# Altium PCB Ajchel_Jakub_plytka_wstepne_rozmieszczenie.PcbDoc
Units mm, origin at the board's own origin, x right, y up, seen from the top; angles counter-clockwise.
Board outline 152.4 x 101.6 mm, 2 copper layers (Top Layer, Bottom Layer); 80 components, 0 nets, 216 pads, 66 vias.
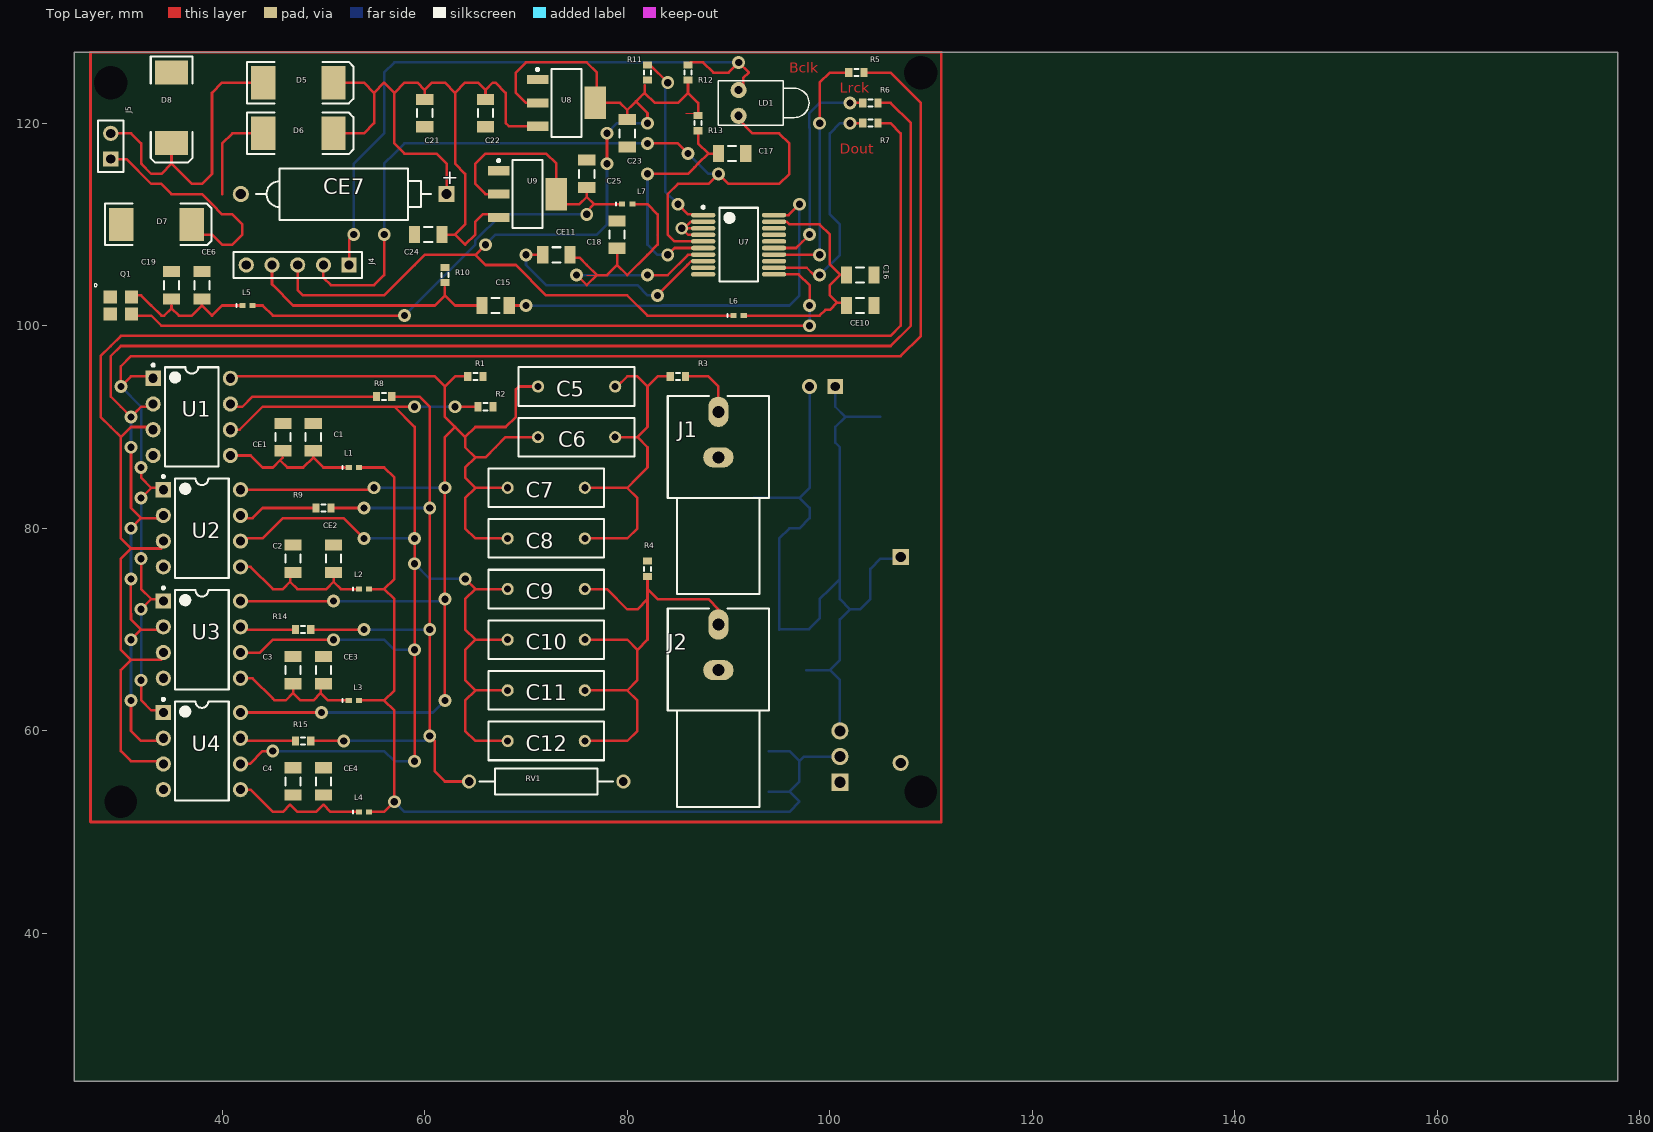
[diagram p0: Top Layer view]
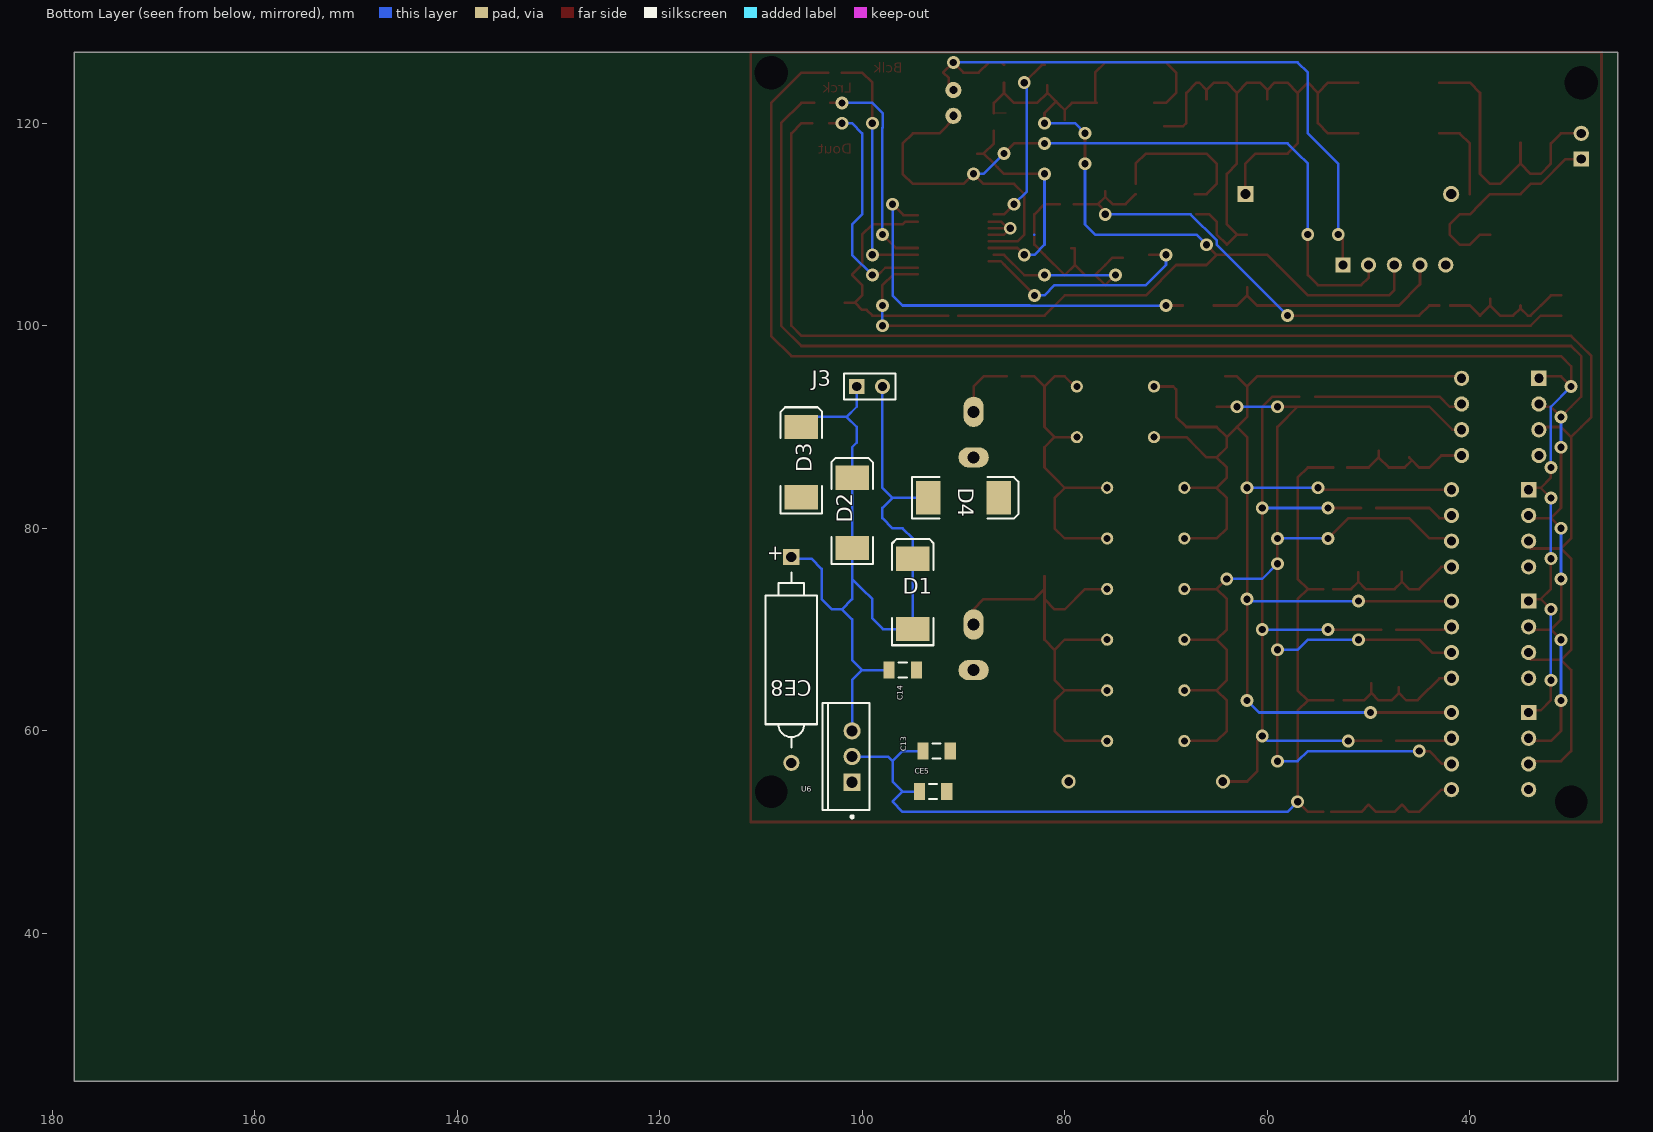
[diagram p1: Bottom Layer view, seen from below]

## Layer stack, top to bottom
Top Solder: solder mask 0.0102, Solder Resist, Dk 3.5
Top Layer: signal copper 0.0356
Dielectric 1: dielectric 0.32, FR-4, Dk 4.8
Bottom Layer: signal copper 0.0356
Bottom Solder: solder mask 0.0102, Solder Resist, Dk 3.5

## Board outline
25.4,25.4 177.8,25.4 177.8,127 25.4,127

## Design rules (kind name [scope] priority, off if disabled: settings)
Clearance [All] p1: gap=0.254 ignorepadtopadclearanceinfootprint=FALSE except(0: Arc-Hole Track-Hole SMDPad-Hole THPad-Hole Via-Hole Fill-Hole Poly-Hole Region-Hole Text-Hole)
PolygonConnect [All] p1: connectstyle=Relief reliefconductorwidth=0.254 reliefentries=4 polygonreliefangle="90 Angle" airgapwidth=0.254
RoutingVias [All] p1: holewidth=0.711 width=1.27 viastyle="Through Hole" minholewidth=0.711 minwidth=1.27 maxholewidth=0.711 maxwidth=1.27
SolderMaskExpansion [All] p1: expansion=0.102
Width [All] p1: maxlimit=0.254 minlimit=0.254 preferedwidth=0.254
30 further rules are at their usual default settings.

## Components (designator, comment, footprint, x,y, rotation, side; value= is the part's Value field where it differs from the comment)
C1 "Comment" C1206 49,89 r90 top
C2 "Comment" C1206 47,77 r90 top
C3 "Comment" C1206 47,66 r90 top
C4 "Comment" C1206 47,55 r90 top
C5 "Comment" RAD-0.3 75,94 r0 top
C6 "Comment" RAD-0.3 75,89 r0 top
C7 "Comment" RAD-0.3 72,84 r0 top
C8 "Comment" RAD-0.3 72,79 r0 top
C9 "Comment" RAD-0.3 72,74 r0 top
C10 "Comment" RAD-0.3 72,69 r0 top
C11 "Comment" RAD-0.3 72,64 r0 top
C12 "Comment" RAD-0.3 72,59 r0 top
C13 "Comment" C1206 92.65,58 r0 bottom
C14 "Comment" C1206 96,66 r0 bottom
C15 "Comment" C1206 67,102 r0 top
C16 "Comment" C1206 103,105 r0 top
C17 "Comment" C1206 90.35,117 r0 top
C18 "Comment" C1206 79,109 r90 top
C19 "Comment" C1206 35,104 r90 top
C21 "Comment" C1206 60,121 r90 top
C22 "Comment" C1206 66,121 r90 top
C23 "Comment" C1206 80,119 r90 top
C24 "Comment" C1206 60.35,109 r0 top
C25 "Comment" C1206 76,115 r90 top
CE1 "Comment" C1206 46,89 r90 top
CE2 "Comment" C1206 51,77 r90 top
CE3 "Comment" C1206 50,66 r90 top
CE4 "Comment" C1206 50,55 r90 top
CE5 "Comment" C1206 93,54 r0 bottom
CE6 "Comment" C1206 38,104 r90 top
CE7 "Comment" POLAR0.8 52,113 r0 top
CE8 "Comment" POLAR0.8 107,67 r90 bottom
CE10 "Comment" C1206 103,102 r0 top
CE11 "Comment" C1206 73,107 r0 top
D1 "Comment" SMC 95,73.525 r90 bottom
D2 "Comment" SMC 101,81.525 r90 bottom
D3 "Comment" SMC 106,86.525 r90 bottom
D4 "Comment" SMC 90,83 r180 bottom
D5 "Comment" SMC 47.525,124 r0 top
D6 "Comment" SMC 47.525,119 r0 top
D7 "Comment" SMC 33.525,110 r0 top
D8 "Comment" SMC 35,121.525 r270 top (schematic designator D5)
J1 "Comment" RCA/4.5-H2 89,83 r270 top
J2 "Comment" RCA/4.5-H2 89,62 r270 top
J3 "Comment" HDR1X2 100.54,94 r180 bottom
J4 "Comment" HDR1X5 52.54,106 r180 top
J5 "Comment" HDR1X2 29,116.46 r90 top
L1 "Comment" 0402-A 53,86 r0 top
L2 "Comment" 0402-A 54,74 r0 top
L3 "Comment" 0402-A 53,63 r0 top
L4 "Comment" 0402-A 54,52 r0 top
L5 "Comment" 0402-A 42.5,102 r0 top
L6 "Comment" 0402-A 91,101 r0 top
L7 "Comment" 0402-A 80,112 r0 top
LD1 "Comment" LED-1 91,122 r0 top
Q1 "Comment" "CTS 403" 30,102 r0 top
R1 "Comment" J1-0603 65,95 r0 top
R2 "Comment" J1-0603 66,92 r0 top
R3 "Comment" J1-0603 85,95 r0 top
R4 "Comment" J1-0603 82,76 r90 top
R5 "Comment" J1-0603 102.625,125 r0 top
R6 "Comment" J1-0603 104,122 r0 top
R7 "Comment" J1-0603 104,120 r0 top
R8 "Comment" J1-0603 56,93 r0 top
R9 "Comment" J1-0603 50,82 r0 top
R10 "Comment" J1-0603 62,105 r90 top
R11 "Comment" J1-0603 82,125 r90 top
R12 "Comment" J1-0603 86,125 r90 top
R13 "Comment" J1-0603 87,120 r90 top
R14 "Comment" J1-0603 48,70 r0 top
R15 "Comment" J1-0603 48,59 r0 top
RV1 "Comment" AXIAL-0.6 72,55 r0 top
U1 "Comment" DIP8 37,91 r0 top
U2 "Comment" DIP8 38,80 r0 top
U3 "Comment" DIP8 38,69 r0 top
U4 "Comment" DIP8 38,58 r0 top
U6 "Comment" LT-T-3 101,57.46 r0 bottom
U7 "Comment" SSOP20_M 91,108 r0 top
U8 "Comment" MP04A_L 74,122 r0 top
U9 "Comment" MP04A_L 70.15,113 r0 top

## Footprints (in the part's own frame and the unit in brackets; to place one, negate y for a bottom-side part, rotate by r counter-clockwise, add the part's x,y. Pads: shape width x height; smd on the part's side, far side on the other; paste and mask are expansions set on the pad)
0402-A [mm] "Chip Inductor, Body 1.0x0.5mm, IPC High Density"
  rect 0.6x0.5 smd: 1(-0.5,0) 2(0.5,0)
  silkscreen extent -1.1,-0.15 -1.1,0.15, body extent -0.55,-0.3 0.55,0.3, height 0.55
AXIAL-0.6 [mm] "Axial Device, Thru-Hole; 2 Leads; 0.6 in Pin Spacing"
  round 1.4 hole 0.85: 1(-7.62,0) 2(7.62,0)
  silkscreen extent -6.6,-1.27 6.6,1.27
C1206 [mm] "Chip Capacitor, Body 3.2x1.6mm, IPC High Density"
  rect 1.1x1.7 smd: 1(-1.35,0) 2(1.35,0)
  silkscreen extent -0.4,-0.75 0.4,0.75, body extent -1.7,-0.9 1.7,0.9, height 1.3
"CTS 403" [mm]
  rect 1.3x1.3 smd: 1(-1.05,0.85) 2(-1.05,-0.85) 3(1.05,-0.85) 4(1.05,0.85)
  silkscreen extent -2.64,1.86 -2.36,2.14, body extent -1.6,-1.25 1.6,1.25, height 0.77
DIP8 [mm] "DIP, 8-Leads, Row Spacing 7.62mm, Pitch 2.54mm, Body 9.33x6.35mm"
  rect 1.5x1.5 hole 0.9: 1(-3.81,3.81)
  round 1.5 hole 0.9: 2(-3.81,1.27) 3(-3.81,-1.27) 4(-3.81,-3.81) 5(3.81,-3.81) 6(3.81,-1.27) 7(3.81,1.27) 8(3.81,3.81)
  silkscreen extent -3.93,-4.9 2.65,5.23, body extent -3.3,-4.9 3.3,4.9, height 5.08
HDR1X2 [mm] "Connector; Header; 2 Position"
  rect 1.5x1.5 hole 0.9: 1(0,0)
  round 1.5 hole 0.9: 2(2.54,0)
  silkscreen extent -1.27,-1.27 3.81,1.27
HDR1X5 [mm] "Connector; Header; 5 Position"
  rect 1.5x1.5 hole 0.9: 1(0,0)
  round 1.5 hole 0.9: 2(2.54,0) 3(5.08,0) 4(7.62,0) 5(10.16,0)
  silkscreen extent -1.27,-1.27 11.43,1.27
J1-0603 [mm] "Chip Resistor, Body 1.6x0.8mm, IPC High Density"
  rect 0.7x0.9 smd: 1(-0.75,0) 2(0.75,0)
  silkscreen extent -0.2,-0.35 0.2,0.35, body extent -0.85,-0.48 0.85,0.48, height 0.9
LED-1 [mm] "LED; 2 Leads"
  round 1.6 hole 0.8: 1(0,1.27) 2(0,-1.27)
  silkscreen extent -2,-2.2 6.95,2.2
LT-T-3 [mm] "T, 3-Leads, Body 10.55x4.6mm, Pitch 2.54mm"
  rect 1.7x1.7 hole 1.1: 1(0,2.54)
  round 1.7 hole 1.1: 2(0,0) 3(0,-2.54)
  silkscreen extent -1.7,-5.3 2.9,6.07, body extent -1.7,-5.28 2.9,5.28, height 22.15
MP04A_L [mm] "SOT223, 4-Leads, Body 6.5x3.5mm, Pitch 2.3mm, Lead Span 7mm, IPC High Density"
  rect 2.1x0.9 smd: 1(-2.85,2.3) 2(-2.85,0) 3(-2.85,-2.3)
  rect 2.1x3.2 smd: 4(2.85,0)
  silkscreen extent -2.97,-3.35 1.5,3.42, body extent -1.86,-3.35 1.86,3.35, height 1.8
POLAR0.8 [mm] "Polarized Capacitor; 2 Leads"
  rect 1.6x1.6 hole 1: 1(10.16,0)
  round 1.6 hole 1: 2(-10.16,0)
  silkscreen extent -8.64,-2.54 8.64,2.54
RAD-0.3 [mm] "Radial Cap, Thru-Hole; 2 Leads; 0.3 in Pin Spacing"
  round 1.2 hole 0.7: 1(-3.81,0) 2(3.81,0)
  silkscreen extent -5.71,-1.91 5.71,1.91
RCA/4.5-H2 [mm] "Two Conductor Jack (RCA), Right Angle, Thru-Hole, Body 10 x 10 x 13 mm (WxTxH)"
  oval 2x3 hole 1.2: 1A(-4,0)
  oval 3x2 hole 1.2: 2B(-8.496,0)
  silkscreen extent -10.07,-5 9.5,5
SMC [mm] "DO-214-AB/SMC; 2 C-Bend Leads; Body 7.9 x 5.9 mm, inc. leads (LxW)"
  rect 2.4x3.3 smd: 1(-3.475,0) 2(3.475,0)
  silkscreen extent -5.07,-2.05 5.43,2.05
SSOP20_M [mm] "SOP, 20-Leads, Body 7.2x5.29mm, Pitch 0.65mm, IPC Low Density"
  oval 2.4x0.45 smd: 1(-3.5,2.925) 2(-3.5,2.275) 3(-3.5,1.625) 4(-3.5,0.975) 5(-3.5,0.325) 6(-3.5,-0.325) 7(-3.5,-0.975) 8(-3.5,-1.625) 9(-3.5,-2.275) 10(-3.5,-2.925) 11(3.5,-2.925) 12(3.5,-2.275) 13(3.5,-1.625) 14(3.5,-0.975) 15(3.5,-0.325) 16(3.5,0.325) 17(3.5,0.975) 18(3.5,1.625) 19(3.5,2.275) 20(3.5,2.925)
  silkscreen extent -3.62,-3.65 1.9,3.82, body extent -2.69,-3.66 2.69,3.67, height 1.98

## Part data
C1 C2 C3 C4 C5 C6 C7 C8 C9 C10 C11 C12 C13 C14 C15 C16 C17 C18 C19 C21 C22 C23 C24 C25: library part Cap, "Capacitor"
CE7 CE8: library part "Cap Pol2", "Polarized Capacitor (Axial)"
D1 D2 D3 D4 D5 D6 D7 D8: library part D-AK-2
J1 J2: library part RCA, "RCA Phono Jack, Right Angle, Thru-Hole, Snap-In"
J3 J5: library part "Header 2", "Header, 2-Pin"
J4: library part "Header 5", "Header, 5-Pin"
L1 L2 L3 L4 L5 L6 L7: library part Inductor, "Inductor"
LD1: library part LED1, "Typical RED GaAs LED"
Q1: library part Oscilator12mhz, "Oscilator 12MHz"
R1 R2 R3 R4 R5 R6 R7 R8 R9 R10 R11 R12 R13 R14 R15: library part Res2, "Resistor"
RV1: library part "Res Adj2", "Variable Resistor"
U1 U2 U3 U4: library part TDA1543, "TDA1543"
U6: library part LT-LT1086-T-3
U7: library part WM8804
U8 U9: library part PM-REG-LM1086ADJ-SOT4

## Free pads (board coordinates)
  round 1.524 hole 3.3 unplated: 1(29,124) 4(109,125)
  round 1.524 hole 3.2 unplated: 2(30,53) 3(109,54)

## Via types
v1: diameter 1.27, hole 0.711, Top Layer to Bottom Layer, 66 vias

## Nets (pads, with @x,y where several pads share a name; then routed paths per layer and width w, separated by ;. In a path a pad name is that pad's centre, name@x,y a point inside that pad or via, vN(x,y) a via of type N, cw(c..) or ccw(c..) an arc to the next point about the centre after c; other vN are vias at no path point)
pads on no net: C1.1 C1.2 C2.1 C2.2 C3.1 C3.2 C4.1 C4.2 C5.1 C5.2 C6.1 C6.2 C7.1 C7.2 C8.1 C8.2 C9.1 C9.2 C10.1 C10.2 C11.1 C11.2 C12.1 C12.2 C13.1 C13.2 C14.1 C14.2 C15.1 C15.2 C16.1 C16.2 C17.1 C17.2 C18.1 C18.2 C19.1 C19.2 C21.1 C21.2 C22.1 C22.2 C23.1 C23.2 C24.1 C24.2 C25.1 C25.2 CE1.1 CE1.2 CE2.1 CE2.2 CE3.1 CE3.2 CE4.1 CE4.2 CE5.1 CE5.2 CE6.1 CE6.2 CE7.1 CE7.2 CE8.1 CE8.2 CE10.1 CE10.2 CE11.1 CE11.2 D1.1 D1.2 D2.1 D2.2 D3.1 D3.2 D4.1 D4.2 D5.1 D5.2 D6.1 D6.2 D7.1 D7.2 D8.1 D8.2 J1.1A J1.2B J2.1A J2.2B J3.1 J3.2 J4.1 J4.2 J4.3 J4.4 J4.5 J5.1 J5.2 L1.1 L1.2 L2.1 L2.2 L3.1 L3.2 L4.1 L4.2 L5.1 L5.2 L6.1 L6.2 L7.1 L7.2 LD1.1 LD1.2 Q1.1 Q1.2 Q1.3 Q1.4 R1.1 R1.2 R2.1 R2.2 R3.1 R3.2 R4.1 R4.2 R5.1 R5.2 R6.1 R6.2 R7.1 R7.2 R8.1 R8.2 R9.1 R9.2 R10.1 R10.2 R11.1 R11.2 R12.1 R12.2 R13.1 R13.2 R14.1 R14.2 R15.1 R15.2 RV1.1 RV1.2 U1.1 U1.2 U1.3 U1.4 U1.5 U1.6 U1.7 U1.8 U2.1 U2.2 U2.3 U2.4 U2.5 U2.6 U2.7 U2.8 U3.1 U3.2 U3.3 U3.4 U3.5 U3.6 U3.7 U3.8 U4.1 U4.2 U4.3 U4.4 U4.5 U4.6 U4.7 U4.8 U6.1 U6.2 U6.3 U7.1 U7.2 U7.3 U7.4 U7.5 U7.6 U7.7 U7.8 U7.9 U7.10 U7.11 U7.12 U7.13 U7.14 U7.15 U7.16 U7.17 U7.18 U7.19 U7.20 U8.1 U8.2 U8.3 U8.4 U9.1 U9.2 U9.3 U9.4
copper on no net: | length 2358
  Top Layer w0: 76,105 77,105 ; 85.8,121 87,121
  Top Layer w0.254: 29,116.46 30.54,116.46 33,114 34,114 35,113 38,113 39,112 40,111 41,111 42,110 42,109 41,108 40,108 39,109 38,109 ; 29,119 30,119 31,119 32,118 32,116 ; v1(31,63) 31,60 32,59 33,59 34,59 ; v1(31,69) 32,70 ; v1(31,75) 30.984,74.984 30.984,71.563 31,71.547 31,71 32,70 ; v1(31,80) 32,81 ; v1(31,88) 31,83 31,82 32,81 ; 31,101 33,101 34,100 v1(98,100) ; 31,103 31.984,103 32.984,102 ; v1(32,65) 32.016,64.984 32.016,63 33,62.016 33.984,62.016 34,62 ; v1(32,72) 33,73 ; v1(32,77) 32.016,76.984 32.016,74.563 32,74.547 32,74 33,73 ; v1(32,83) 33,84 ; v1(32,86) 32,85 33,84 ; 32,95 31.587,95 31,95 v1(30,94) 30,96 31,97 44,97 80.825,97 97,97 107,97 109,99 109,121 109,122 106,125 103.375,125 ; 32.048,116 32,116 ; 32.095,95 33,95 ; 33,92 32,92 31.587,91.587 v1(31,91) 30,92 29,93 29,97 30,98 47,98 72,98 98,98 106,98 108,100 108,102 108,120 106,122 104.75,122 ; 33,102 34,101 34.281,101 35,101.719 ; 33.19,89.73 32.92,90 31,90 30.641,89.641 30,89 ; 34,67 31,67 ; 34,70 32,70 ; 34,73 33,73 ; 34,78 32,78 31,78 ; 34,81 33,81 32,81 ; 34,84 33,84 ; 34.19,56.73 33.92,57 31,57 30,58 30,62.547 29.984,62.563 29.984,65.984 30,66 31,67 ; 35,102 35,101.719 ; 35,118.05 35,117 35,116 ; 38,102.65 38,102 ; 40,113 40,116 40,118 41,119 42,119 43,119 ; 40.81,87.19 42.81,87.19 44,86 45,86 45.719,86.719 ; 40.81,89.73 41.73,89.73 44,92 45,92 46,92 47,92 51,92 v1(59,92) ; 41,92 42,92 43,93 50,93 55.25,93 ; 41,95 43,95 61,95 62,94 ; 41.81,54.19 42.81,54.19 45,52 46,52 46.719,52.719 47.438,52 48,52 49,52 49.281,52 50,52.719 50.719,52 51,52 52,52 53.7,52 ; 41.81,56.73 42.73,56.73 44,58 v1(45,58) ; 41.81,61.81 v1(49.81,61.81) ; 41.81,65.19 43,65.19 45,63.19 45.19,63 46.281,63 47,63.719 ; 41.81,67.73 43.73,67.73 45,69 v1(51,69) ; 41.81,72.81 v1(51,72.81) ; 41.81,76.19 42.81,76.19 45,74 46,74 46.719,74.719 ; 41.81,83.81 52.81,83.81 v1@54.81,83.81 ; 41.95,102 41.169,102 40,102 39,101 38,102 ; 42,70 44,70 47.25,70 ; 42,81 43,81 44,82 49.25,82 ; 42.08,79 43,79 44,79 46,81 47,81 52,81 v1(54,79) ; 43,102 44,102 45,101 v1(58,101) ; 43,124 41,124 40,124 39,123 39,115 38,114 37,114 35,116 ; 44.92,106 44.92,104.08 45,104 47,102 61,102 62,103 ; 46,87 45.719,86.719 ; 46.719,75.719 46.719,74.719 ; 47,64.3 47,63.719 ; 47.25,59 46,59 42.08,59 ; 47.46,106 47.46,103.54 48,103 56,103 57,104 59,106 60,107 65,107 ; 48.75,59 v1(52,59) ; 48.75,70 v1(54,70) ; 49,87.65 49,87 ; 49.719,64.719 49.719,63.719 ; 50,106 50,104.73 50.73,104 51,104 55,104 56,105 v1(56,109) ; 50.75,82 v1(54,82) ; 51,75.65 51,74.719 ; 51,119 54,119 55,120 55,121 55,123 ; 51,124 54,124 55,123 ; 52.1,86 51,86 50,86 49,87 ; 52.45,63 52,63 50.438,63 49.719,63.719 ; 52.54,106 52.54,107.524 52.54,108.54 v1(53,109) ; 53.5,63 55,63 56,63 ; 53.5,74 52.819,74 51.719,74 51,74.719 ; 53.5,86 56,86 57,85 57,83 57,79 57,76 57,75 56,74 ; 54.5,52 56,52 v1(57,53) 57,54 57,56 57,58 57,62 56,63 ; 54.5,74 56,74 ; 56.85,93 57.481,93 59,93 59.5,93 60.492,92.008 60.492,91.508 60.492,87.508 60.492,75.492 60.492,66.492 v1(60.492,59.492) 61,58.984 61,56 62,55 63,55 64.38,55 ; 57,92 59,90 59,81 v1(59,76.5) v1(59,57) ; 60,122.35 60,123.281 ; v1(62,63) 62,64 62,75 62,89 63,90 ; 62,103.8 62,103 ; 62.05,109 63,109 ; 62.16,113 62.16,116 61.16,117 61,117 58,117 57,118 57,123 ; v1(63,92) 65,92 ; v1(64,75) 65,74 ; 64.15,95 63,95 62,94 ; 65.3,102 64,102 63,102 62,103 ; v1(66,108) 65,107 ; 66,122.35 66,123.281 ; 67,111 65.719,111 65,110.281 65,110 65,109 64,108 63,109 ; 67.15,113 66,113 65,114 65,116 66,117 72,117 73,116 73,114 ; 67.851,79 68.19,79 ; 68,74 65,74 ; 68.021,79 65,79 64,80 64,81 64,82 64,83 65,84 ; 68.19,59 67,59 65,59 64,60 64,63 65,64 ; 68.19,64 65,64 ; 68.19,69 65,69 ; 68.19,84 65,84 ; 68.35,102 v1(70,102) ; v1(70,107) 71.65,107 ; 70.15,119.7 68.3,119.7 68,120 68,123 67,124 66.719,124 66,123.281 ; 71.15,122 70,122 69,123 69,124 69,125 70,126 76,126 77,125 77,124 77,122 ; 71.19,89 70,89 68,89 67,88 66,87 65,87 ; 71.19,94 69.285,94 69,93.715 69,92 69,91 68,90 66,90 65,90 64,89 ; 73,113 74,112 75.281,112 76,112.719 ; 74.281,106.719 75.281,106.719 76,106 77,105 ; v1(75,105) 76,104 77,105 ; 75.81,59 77,59 79,59 80,59 81,60 81,63 80,64 ; 75.81,69 76.81,69 80,69 81,68 ; 75.81,74 78,74 80,72 81,72 82,73 82,73.125 ; 75.81,79 78,79 79,79 80,79 81,80 81,83 80,84 ; 75.81,84 79,84 80,84 ; 76,64 76.715,64 80,64 ; v1@76,111.281 76.719,112 ; 76,113.3 76,112.719 ; 76.85,122 79,122 79.281,122 80,121.281 ; v1(78,116) 78,117.984 v1@78,118.55 ; 78.81,89 81,89 ; 79,94 80,95 81,95 82,94 ; 79.1,112 78,112 76.719,112 ; 79.35,107.65 79,107.65 79,106 ; 80,120.35 80,120.563 80,121.281 ; 80.5,112 82,112 83,111 83,110 83,108 82,107 80,105 79,106 ; 81.071,122.352 80.5,121.781 80,121.281 ; 81.719,123.719 81.719,123 ; 82,74 83,73 88,73 89,72 89,70.5 ; 82,75.25 82,71 82,70.25 82,69 81,68 ; v1(82,105) 84,105 86,107 87,107 ; v1(82,115) 86,115 86.641,115.641 87,116 88,117 ; v1(82,118) 85,118 v1(86,117) ; v1(82,120) 82,121 80.86,122.14 81.282,122.563 81.719,123 ; 82,125.75 82.25,125.75 v1(84,124) ; v1@82.971,103.029 85.943,106 86.318,106.375 87.5,106.375 ; 83.984,113 83.984,109 84.659,108.325 85,108.325 87.5,108.325 ; v1(84,107) 84.675,107.675 87.5,107.675 ; 84,113 85,114 88,114 v1(89,115) 90,114 91,114 94.5,114 95,114 96,115 96,118 95,119 92.365,119 90.817,120.548 ; 84.25,95 83,95 82,94 ; v1(85,112) 86,111 87,111 ; 85.75,95 88,95 89,94 89,92 ; 86,124 86,123 ; 86,125.75 86.25,126 87.5,126 88.5,125 90,125 v1(91,126) 92,125 91.451,124.451 91.451,123.721 91,123.27 ; 86.343,109.625 87.5,109.625 v1(85.375,109.625) ; 87,119.25 87,118 88,117 ; 87,121 87,122 86,123 ; 87.5,108.975 86.162,108.975 86.025,108.975 v1(85.375,109.625) ; 87.5,110.275 86.275,110.275 85.625,109.625 v1(85.375,109.625) ; 88.65,117 88,117 ; 90.5,101 83,101 82,101 80,103 72,103 69,106 66,106 65.359,106.641 65,107 ; 91.5,101 92.282,101 93,101 94,101 99,101 99.562,101.562 100,101.562 100.719,102.281 ; 94.5,105.075 96.925,105.075 98,104 98,103.016 v1(98,102) ; 94.5,105.725 97.725,105.725 98.45,105 v1(99,105) ; 94.5,107.025 v1@99,107.025 ; 94.5,107.675 96.675,107.675 97.282,108.282 v1(98,109) ; 94.5,110.275 95.725,110.275 96,110 99,110 100,109 100,106.05 101,105.05 101,105 100,104 100,103 100.719,102.281 ; 94.5,110.925 95.925,110.925 v1(97,112) ; v1(99,120) 99,124 100,125 102,125 ; 101.719,102.281 100.719,102.281 ; v1(102,120) 103.25,120 ; 103.15,122 v1(102,122) ; 104.95,120 106,120 107,119 107,100 106,99 91,99 30,99 29,98 28,97 28,95 28,91 29,90 30,89 ; 30,89 30,87 30,80 30,79 30.641,78.359 31,78 ; 31,67 30,68 30,76 30,77 31,78 ; 32,116 33,115 34,115 35,116 ; 35,101.719 35.719,101 36,101 37,101 38,102 ; 42.08,59 41.81,59.27 42.08,59 ; 45.719,86.719 46.438,86 48,86 49,87 ; 46.719,74.719 47.438,74 49,74 50.281,74 51,74.719 ; 47,63.719 47.719,63 49,63 49.719,63.719 ; 55,123 56,124 57,123 ; 56,63 57,64 57,67 57,70 57,71 57,73 56,74 ; 57,123 58,124 59,124 59.281,124 60,123.281 ; 60,123.281 60.719,124 62,124 63,123 ; 62,94 62,91 63,90 ; 63,90 64,89 ; 63,109 64,110 64,115 63,116 63,122.35 63,123 ; 63,123 64,124 65,124 65.281,124 66,123.281 ; 64,89 64,88 65,87 ; 65,64 64,65 64,68 65,69 ; 65,69 64,70 64,72 64,73 65,74 ; 65,84 64,85 64,86 65,87 ; 76,112.719 76.719,112 ; 77,105 78,105 79,106 ; 80,64 81,65 81,66 81,68 ; 80,84 81,85 82,86 82,87 82,88 81,89 ; 81,89 82,90 82,91 82,94 ; 81.719,123 82.719,122 84,122 85,122 86,123 ; v1(102,122) v1@102.519,122 ; v1(102,122) v1@102.519,122 ; v1(102,122) v1@102.519,122 ; 27,51 111,51 111,127 27,127 27,51
  Bottom Layer w0.254: v1(30,94) 32,92 32.016,91.984 32.016,87.563 32,87.547 v1(32,86) ; v1(31,63) v1(31,69) ; v1(31,75) 31,78 v1(31,80) ; v1(31,88) v1(31,91) ; v1(32,65) 32,68.547 32.016,68.563 32.016,71.984 v1(32,72) ; v1(32,77) 32,79.547 32.016,79.563 32.016,82.984 v1(32,83) ; v1(45,58) 45.016,57.984 52.421,57.984 52.437,58 56,58 57,57 57.984,57 v1(59,57) ; v1(49.81,61.81) 60.81,61.81 v1(62,63) ; v1(51,69) 51.016,68.984 54.421,68.984 54.437,69 56,69 57,68 v1(59,68) ; v1(51,72.81) 58.19,72.81 59.81,72.81 v1@61.81,72.81 ; v1(52,59) 59,59 60,59 ; v1(53,109) 53,116 56,119 56,125 57,126 v1(91,126) ; v1(54,70) 59.476,70 v1(60.492,70) ; v1(54,79) 57.984,79 v1(59,79) ; v1(54,82) v1(60.492,82) ; v1(55,84) 57.984,84 59,84 v1(62,84) ; v1(56,109) 56,116 57,117 58,118 v1(82,118) ; v1(57,53) 58,52 96,52 97,53 96,54 ; v1(58,101) 64.984,107.984 64.984,108.421 67.563,111 v1(76,111) ; v1(59,76.5) 60.5,75 v1(64,75) ; v1(59,92) 61.984,92 v1(63,92) ; v1(66,108) 67,109 77,109 78,110 v1(78,116) ; v1(70,102) 70.016,101.984 83.421,101.984 83.437,102 96,102 97,103 v1(97,112) ; v1(70,107) 70,106 72.016,103.984 75.421,103.984 75.437,104 79,104 81,104 82,103 v1(83,103) ; v1(75,105) 79,105 v1(82,105) ; v1(78,119) 79,120 v1(82,120) ; v1(82,115) 82,108 83,107 v1(84,107) ; v1@83.75,124 83.75,113.25 v1(85,112) ; v1(86,117) 87,116 88,115 v1(89,115) ; 92.475,83 97,83 ; 94,54 96,54 ; 94,58 95,58 96,58 97,57 ; 95,70 95,77 95,79 96,80 97,80 98,81 98,82 97,83 ; 95,70.05 97.95,70.05 99,71.1 99,73 100,74 101,75 ; 97.7,66 100,66 ; 98,94 98,92 98,90 98,84 97,83 ; v1(98,100) v1(98,102) ; v1(98,109) 98.016,109.016 98.016,112 98.016,112.984 ; 98,113 98,115 ; 98,114 98,119.547 97.984,119.563 97.984,120.984 99,122 v1(102,122) ; v1(99,105) 101,107 101,108 101,110 100,111 100,119 101,120 ; v1(99,107) 99,112 99,113 v1(99,120) ; 100.54,93.46 100.54,92 101.54,91 ; 101,57.46 97.54,57.46 97.46,57.46 97,57 ; 101,60.42 101,64 101,65 100,66 ; 105,91 101.54,91 ; 106.84,77 105,77 104,76 104,73 103,72 102,72 ; 96,54 97,55 97,56 97,57 ; 100,66 101,67 101,70 101,71 102,72 ; 101,75 101,73 102,72 ; 101,75 101,78 101,85 101,88 100.54,88.46 100.54,90 101.54,91 ; 101,120 v1(102,120) 101,120
  other v1: 62,73

## Other copper
Top Layer:
  region: 79,109
  region: 79,109
  region: 79,109
  region: 79,109
  region: 79,109
  region: 79,109
  region: 79,109
  region: 79,109
  region: 79,109
  region: 79,109
  region: 79,109
  region: 79,109
  region: 79,109
  region: 79,109
  region: 79,109
  region: 79,109
  region: 93,107
  region: 93,107
  region: 93,107
  region: 39,121
  region: 39,121
  region: 39,121
  text "Bclk" at 96,125 h1
  text "Lrck" at 101,123 h1
  text "Dout" at 101,117 h1

## Text inside footprints (layer, text, board x,y; h text height)
CE7: Top Overlay "+" at 61.652,113.95 h1.5
CE8: Bottom Overlay "+" at 107.95,76.652 h1.5 r270
J1: Mechanical 1 "PCB Edge" at 84.382,83.333 h0.25; Mechanical 1 "Alert PCB fab to slot details" at 96.842,93.057 h0.3 r270; Mechanical 1 "Slot 1.2x2.2mm, PTH" at 96.342,93.057 h0.3 r270; Mechanical 1 "Assign keep-out area to slot" at 97.342,93.057 h0.3 r270; Mechanical 1 "Mech 1 - Slot cut-out" at 95.842,93.057 h0.3 r270; Mechanical 1 "Mech 2 - Clearance, move to internal plane if present" at 95.342,93.057 h0.3 r270
J2: Mechanical 1 "PCB Edge" at 84.382,62.333 h0.25; Mechanical 1 "Alert PCB fab to slot details" at 96.842,72.057 h0.3 r270; Mechanical 1 "Slot 1.2x2.2mm, PTH" at 96.342,72.057 h0.3 r270; Mechanical 1 "Assign keep-out area to slot" at 97.342,72.057 h0.3 r270; Mechanical 1 "Mech 1 - Slot cut-out" at 95.842,72.057 h0.3 r270; Mechanical 1 "Mech 2 - Clearance, move to internal plane if present" at 95.342,72.057 h0.3 r270